# Altium PCB hiiri627v07.PcbDoc (part 3 of 3)
Units mm, origin at the board's own origin, x right, y up, seen from the top; angles counter-clockwise.
Board outline 78.49 x 90.04 mm, 2 copper layers (Top, Bottom); 69 components, 154 nets, 484 pads, 208 vias.
Unrouted connection lines stored in the file: 5.
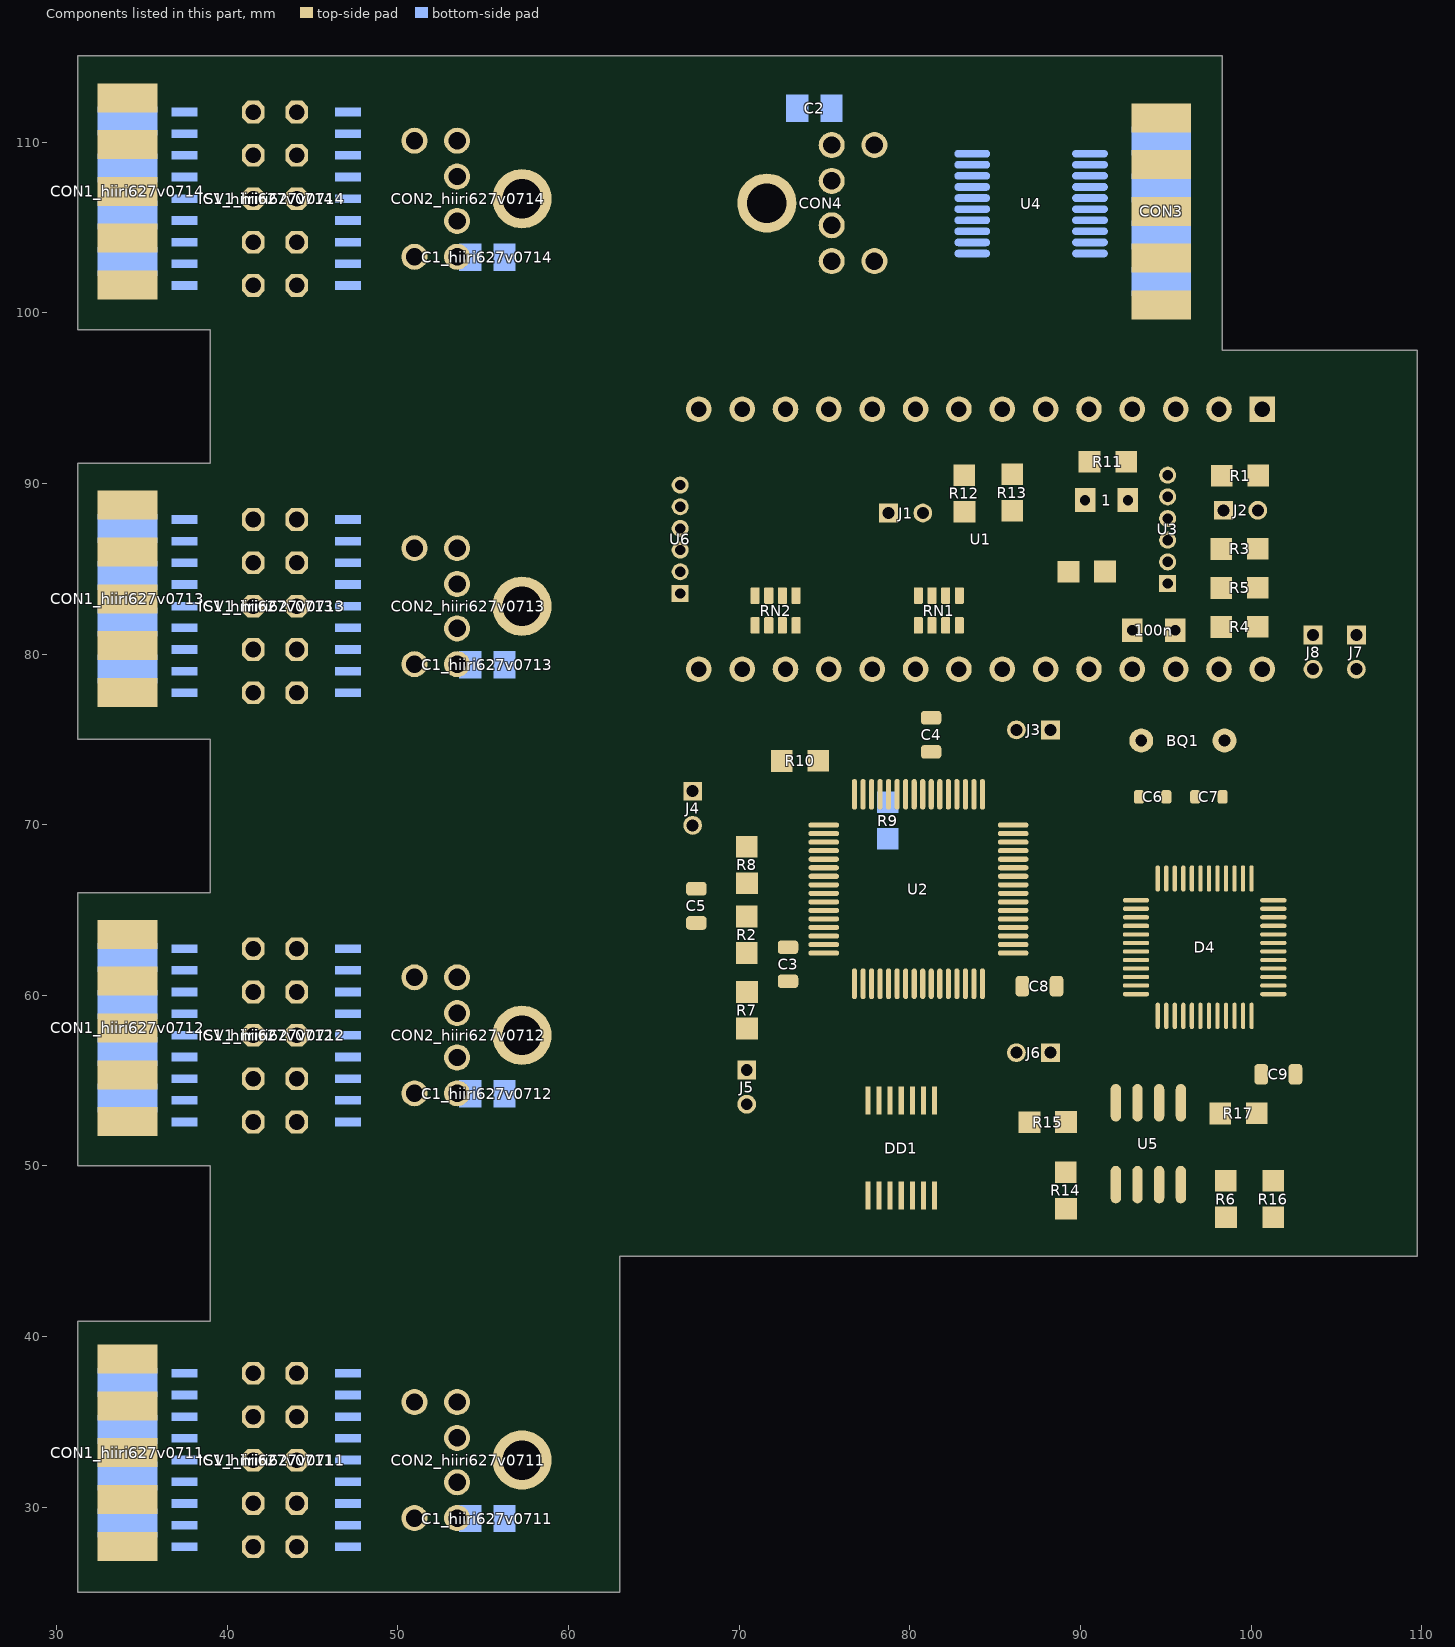
[diagram p3: the components of this part, seen from the top]

## Silkscreen, mask and mechanical layers (free items; w line width, h text height)
Top Overlay:
  lines w0.5: 40.64,40.868 58.471,40.868 ; 40.64,49.936 58.471,49.936 ; 40.64,65.76 58.471,65.76 ; 40.64,75.042 58.471,75.042 ; 40.64,99.212 58.471,99.212 ; 61.722,26.416 61.722,113.792 ; 67.248,97.79 96.495,97.79
  text "phol-labs.ru / amiga ps2" at 49.276,99.568 h1 r90
  text "phol-labs.ru / amiga ps2" at 87.884,98.806 h1 r90
  text "phol-labs.ru / amiga ps2" at 49.022,75.322 h1 r90
  text "phol-labs.ru / amiga ps2" at 48.768,49.911 h1 r90
  text "phol-labs.ru / amiga ps2" at 49.276,25.654 h1 r90
Bottom Overlay:
  drawing of 2 lines, arcs and shapes, not listed

## Text inside footprints (layer, text, board x,y; h text height)
CON1_hiiri627v0711: Top Assembly "5" at 30.297,38.283 h1 r90; Top Assembly "1" at 30.297,27.278 h1 r90; Bottom Assembly "6" at 30.315,29.621 h1 r90; Bottom Assembly "9" at 30.315,37.739 h1 r90; Document "Board" at 30.658,16.688 h1 r90; Document "Board" at 30.658,44.628 h1 r90
CON1_hiiri627v0712: Top Assembly "1" at 30.297,52.17 h1 r90; Top Assembly "5" at 30.297,63.175 h1 r90; Bottom Assembly "9" at 30.315,62.631 h1 r90; Bottom Assembly "6" at 30.315,54.513 h1 r90; Document "Board" at 30.658,69.52 h1 r90; Document "Board" at 30.658,41.58 h1 r90
CON1_hiiri627v0713: Top Assembly "1" at 30.297,77.316 h1 r90; Top Assembly "5" at 30.297,88.321 h1 r90; Bottom Assembly "9" at 30.315,87.777 h1 r90; Bottom Assembly "6" at 30.315,79.659 h1 r90; Document "Board" at 30.658,94.666 h1 r90; Document "Board" at 30.658,66.726 h1 r90
CON1_hiiri627v0714: Top Assembly "1" at 30.297,101.192 h1 r90; Top Assembly "5" at 30.297,112.197 h1 r90; Bottom Assembly "9" at 30.315,111.653 h1 r90; Bottom Assembly "6" at 30.315,103.535 h1 r90; Document "Board" at 30.658,118.542 h1 r90; Document "Board" at 30.658,90.602 h1 r90
CON3: Top Assembly "5" at 98.598,100.853 h1 r270; Top Assembly "1" at 98.598,111.859 h1 r270; Bottom Assembly "6" at 98.58,109.515 h1 r270; Bottom Assembly "9" at 98.58,101.397 h1 r270; Document "Board" at 98.237,122.449 h1 r270; Document "Board" at 98.237,94.509 h1 r270
SV1_hiiri627v0711: Top Assembly "10" at 46.863,31.75 h1 r90; Top Assembly "1" at 44.704,25.146 h1 r90; Top Assembly "2" at 42.164,25.146 h1 r90
SV1_hiiri627v0712: Top Assembly "2" at 42.164,50.038 h1 r90; Top Assembly "1" at 44.704,50.038 h1 r90; Top Assembly "10" at 46.863,56.642 h1 r90
SV1_hiiri627v0713: Top Assembly "10" at 46.863,81.788 h1 r90; Top Assembly "1" at 44.704,75.184 h1 r90; Top Assembly "2" at 42.164,75.184 h1 r90
SV1_hiiri627v0714: Top Assembly "10" at 46.863,105.664 h1 r90; Top Assembly "1" at 44.704,99.06 h1 r90; Top Assembly "2" at 42.164,99.06 h1 r90